# Altium PCB source_test(datasheet).PcbDoc
Units mil, origin at the board's own origin, x right, y up, seen from the top; angles counter-clockwise.
Board outline 6000 x 4000 mil, 2 copper layers (Top Layer, Bottom Layer); 11 components, 4 nets, 33 pads, 0 vias.
Unrouted connection lines stored in the file: 2.
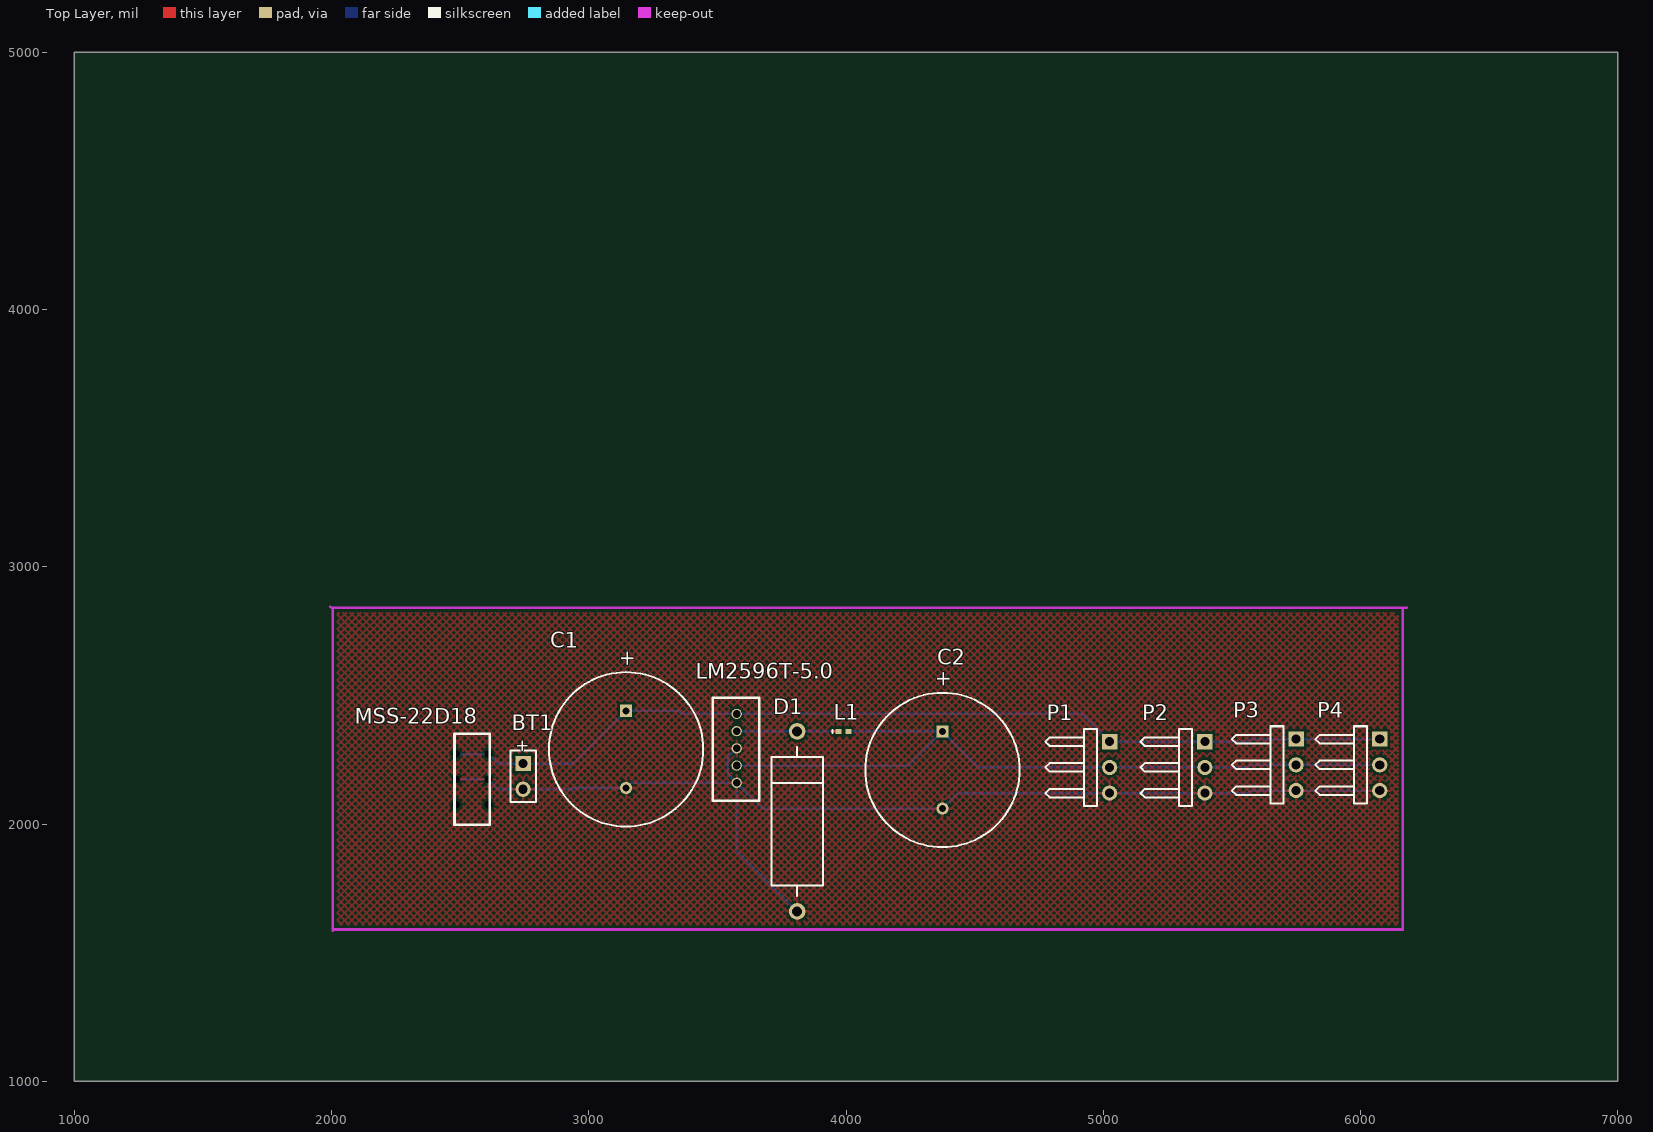
[diagram p0: Top Layer view]
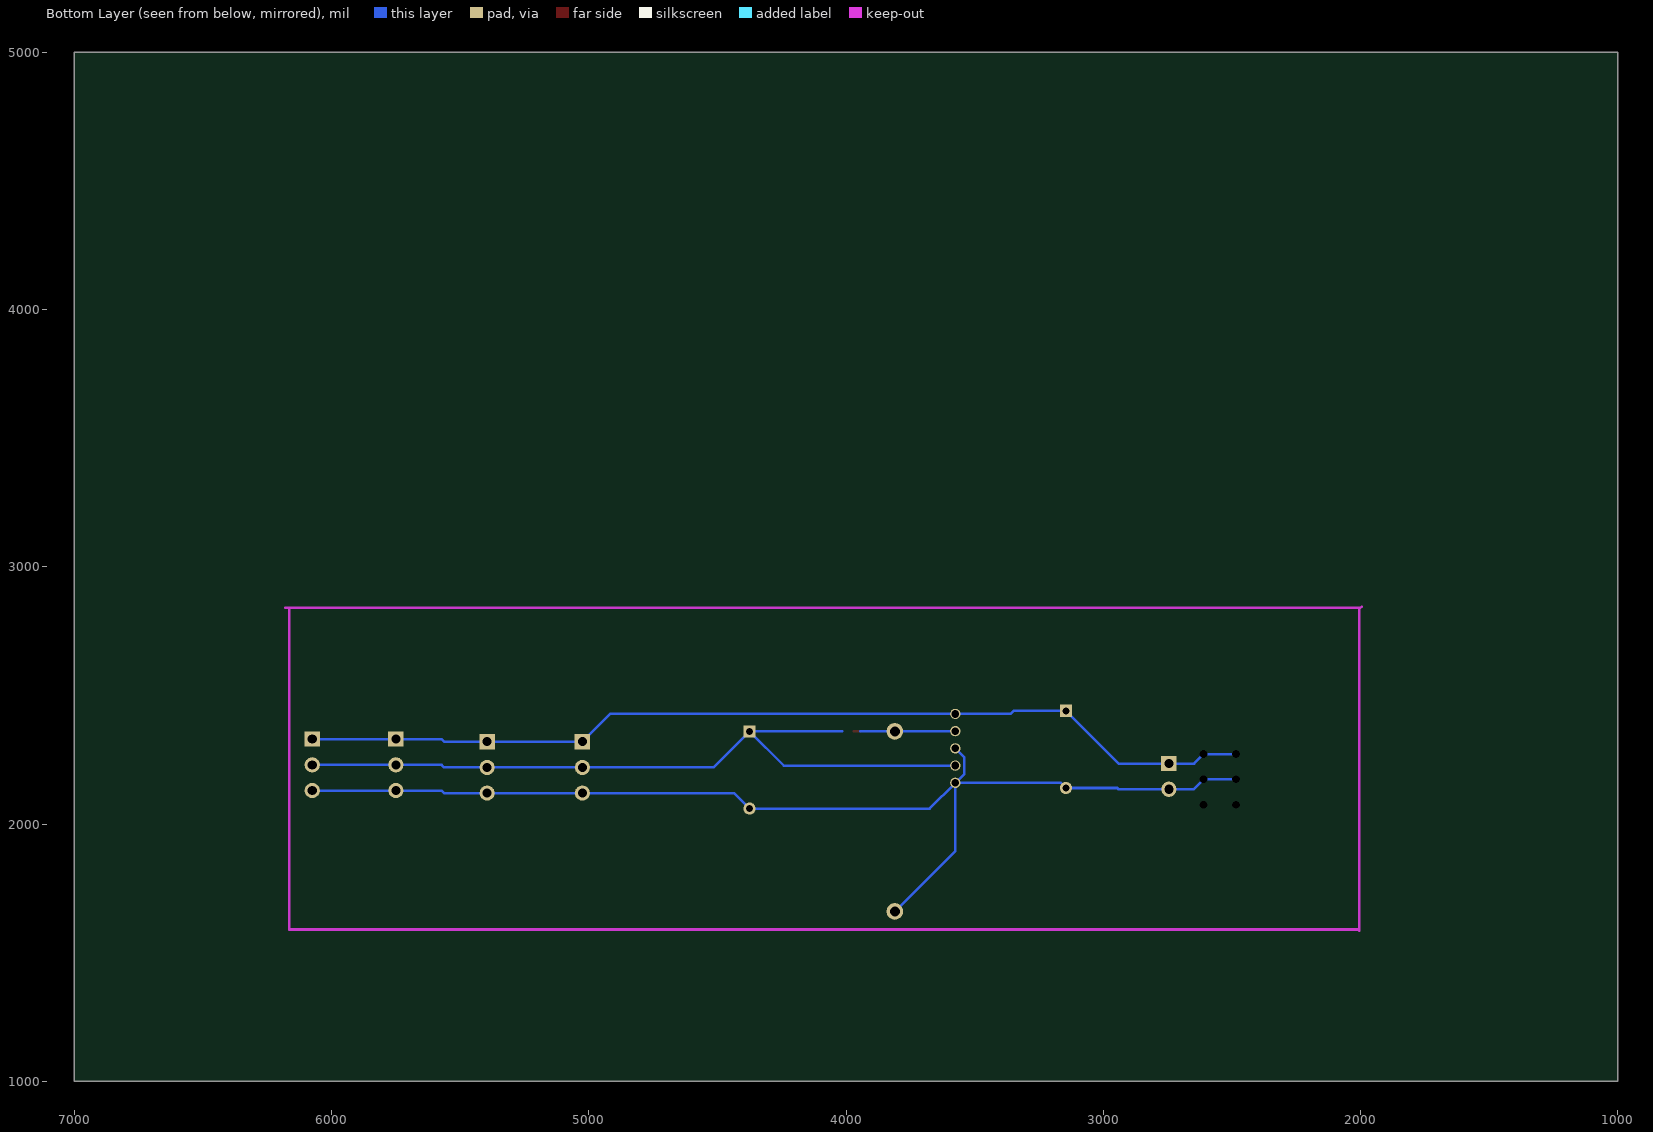
[diagram p1: Bottom Layer view, seen from below]

## Layer stack, top to bottom
Top Solder: solder mask 0.4, Solder Resist, Dk 3.5
Top Layer: signal copper 1.4
Dielectric 1: dielectric 12.6, FR-4, Dk 4.8
Bottom Layer: signal copper 1.4
Bottom Solder: solder mask 0.4, Solder Resist, Dk 3.5

## Board outline
1000,1000 7000,1000 7000,5000 1000,5000

## Design rules (kind name [scope] priority, off if disabled: settings)
Clearance [All] p1: gap=10
PolygonConnect [All] p1: connectstyle=Relief reliefconductorwidth=10 reliefentries=4 polygonreliefangle="90 Angle" airgapwidth=10
RoutingLayers [All] p1: top layer_v5=FALSE bottom layer_v5=TRUE
RoutingVias [All] p1: holewidth=28 width=50 viastyle="Through Hole" minholewidth=28 minwidth=50 maxholewidth=28 maxwidth=50
SolderMaskExpansion [All] p1: expansion=4
Width [All] p1: maxlimit=100 minlimit=10 preferedwidth=10 toplayer_maxwidth=10 minimp=50.000000 maximp=50.000000 favimp=50.000000
29 further rules are at their usual default settings.

## Components (designator, comment, footprint, x,y, rotation, side; value= is the part's Value field where it differs from the comment)
BT1 "Battery" BAT-2 2745,2185 r270 top
C1 "Cap Pol1" RB7.6-15 3145,2290 r90 top
C2 "Cap Pol1" RB7.6-15 4375,2210 r90 top
D1 "D Zener" DIODE-0.7 3810,2010 r90 top
L1 "Inductor" 0402-A 3990.31,2360 r0 top
LM2596T-5.0 "5V" LM2596T-5.0 3575,2294 r270 top
MSS-22D18 "switch" MSS-22D18 2547.01,2173.42 r90 top
P1 "Header 3H" HDR1X3H 5025,2320 r270 top
P2 "Header 3H" HDR1X3H 5395,2320 r270 top
P3 "Header 3H" HDR1X3H 5750,2330 r270 top
P4 "Header 3H" HDR1X3H 6075,2330 r270 top

## Footprints (in the part's own frame and the unit in brackets; to place one, negate y for a bottom-side part, rotate by r counter-clockwise, add the part's x,y. Pads: shape width x height; smd on the part's side, far side on the other; paste and mask are expansions set on the pad)
0402-A [mm] "Chip Inductor, Body 1.0x0.5mm, IPC High Density"
  rect 0.6x0.5 smd: 1(-0.5,0) 2(0.5,0)
  silkscreen extent -1.1,-0.15 -1.1,0.15, body extent -0.55,-0.3 0.55,0.3, height 0.55
BAT-2 [mm] "Battery; 2 Leads"
  rect 1.5x1.5 hole 0.9: 1(-1.27,0)
  round 1.5 hole 0.9: 2(1.27,0)
  silkscreen extent -2.54,-1.27 2.54,1.27
DIODE-0.7 [mm] "Diode, Thru-Hole; 2 Leads; 0.7 in Pin Spacing"
  round 1.65 hole 1: 1(-8.89,0) 2(8.89,0)
  silkscreen extent -7.37,-2.54 7.37,2.54
HDR1X3H [mm] "Connector; Header; 3 Position; Right Angle"
  rect 1.5x1.5 hole 0.9: 1(0,0)
  round 1.5 hole 0.9: 2(2.54,0) 3(5.08,0)
  silkscreen extent -1.27,-6.35 6.35,-1.27
LM2596T-5.0 [mil] "5V"
  round 40 hole 30: 1(-134,0) 2(-67,0) 3(0,0) 4(67,0) 5(134,0)
  silkscreen extent -197,-93 203,87
MSS-22D18 [mil] "switch"
  round 17 hole 30: 1(-98.42,62.99) 2(0,62.99) 3(98.43,62.99) 4(-98.42,-62.99) 5(0,-62.99) 6(98.43,-62.99)
  silkscreen extent -177,-69 177,69
RB7.6-15 [mm] "Polarized Capacitor (Radial); 2 Leads"
  rect 1.2x1.2 hole 0.7: 1(3.81,0)
  round 1.2 hole 0.7: 2(-3.81,0)
  silkscreen extent -7.62,-7.62 7.62,7.62

## Part data
BT1: "Multicell Battery"
C1 C2: "Polarized Capacitor (Radial)"
D1: "Zener Diode"
LM2596T-5.0: library part LM2596T-5.0
MSS-22D18: library part MSS-22D18
P1 P2 P3 P4: "Header, 3-Pin, Right Angle"

## Nets (pads, with @x,y where several pads share a name; then routed paths per layer and width w, separated by ;. In a path a pad name is that pad's centre, name@x,y a point inside that pad or via, vN(x,y) a via of type N, cw(c..) or ccw(c..) an arc to the next point about the centre after c; other vN are vias at no path point)
NetBT1_1: BT1.1 C1.1 LM2596T-5.0.1 MSS-22D18.3 MSS-22D18.6 P1.1 P2.1 P3.1 P4.1 | length 3745
  Bottom Layer w10: MSS-22D18.3 MSS-22D18.6 2646.85,2235 BT1.1 2940,2235 C1.1 3348,2440 3360,2428 LM2596T-5.0.1 4917,2428 P1.1 P2.1 5562,2320 5572,2330 P3.1 P4.1
NetBT1_2: BT1.2 C1.2 C2.2 D1.1 LM2596T-5.0.3 LM2596T-5.0.5 MSS-22D18.2 MSS-22D18.5 P1.3 P2.3 P3.3 P4.3 | length 4448
  Bottom Layer w10: MSS-22D18.2 MSS-22D18.5 2648.42,2135 BT1.2 2940,2135 2945,2140 C1.2 3165,2160 LM2596T-5.0.5 ; LM2596T-5.0.3 3540,2259 3540,2195 LM2596T-5.0.5 ; D1.1 3575,1895 LM2596T-5.0.5 ; P4.3 P3.3 5572,2130 5562,2120 P2.3 P1.3 4435,2120 C2.2 3675,2060 LM2596T-5.0.5
NetC2_1: C2.1 L1.2 LM2596T-5.0.4 P1.2 P2.2 P3.2 P4.2 | length 2977.2
  Bottom Layer w10: LM2596T-5.0.4 4242,2227 C2.1 ; 4015,2360 C2.1 ; P4.2 P3.2 5572,2230 5562,2220 P2.2 P1.2 4515,2220 C2.1
NetD1_2: D1.2 L1.1 LM2596T-5.0.2 | length 396
  Top Layer w10: 3945,2360 L1.1
  Bottom Layer w10: LM2596T-5.0.2 3692,2361 3693,2360 D1.2 3945,2360
pads on no net: MSS-22D18.1 MSS-22D18.4

## Polygon pours and split planes (outlines as drawn)
NetBT1_2 on Top Layer "Top Layer-No Net" (hatched 45Degree grid 20 track 8, remove dead copper, pour order 2): 2005,2840 6165,2840 6165,1590 2010,1590 2010,2835 2005,2840

## Keep-outs
Keep-Out Layer:
  lines w10: 1995,2845 2005,2835 2005,1585 2010,1590 6165,1590 6165,2840 ; 2005,2840 6180,2840

## Text inside footprints (layer, text, board x,y; h text height)
BT1: Top Overlay "+" at 2722.28,2329.49 h45.28 r270
C1: Top Overlay "+" at 3174.01,2610.15 h59.06 r90
C2: Top Overlay "+" at 4404.01,2530.15 h59.06 r90